# EAGLE board rele (EAGLE 5.00)
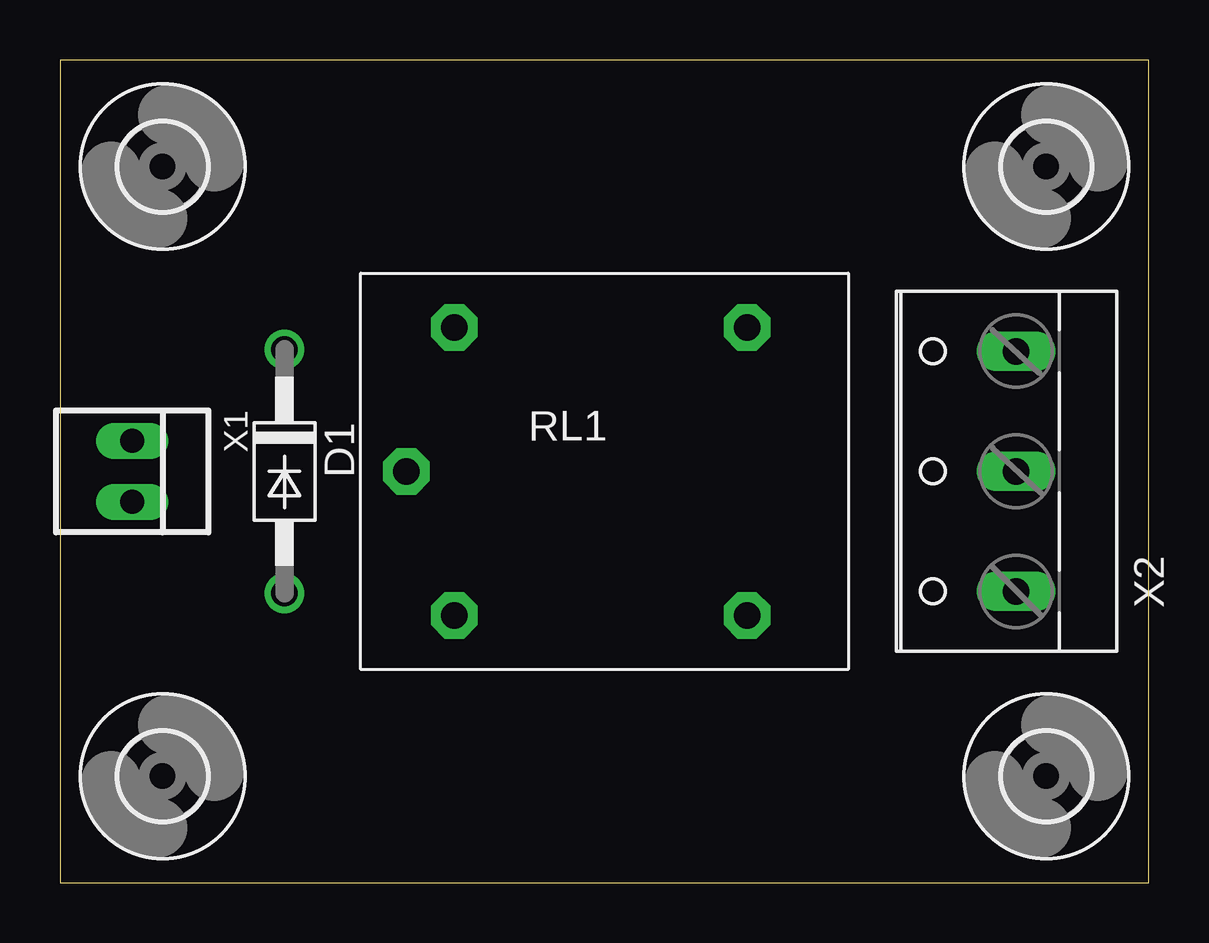
[diagram p0: board, top side]
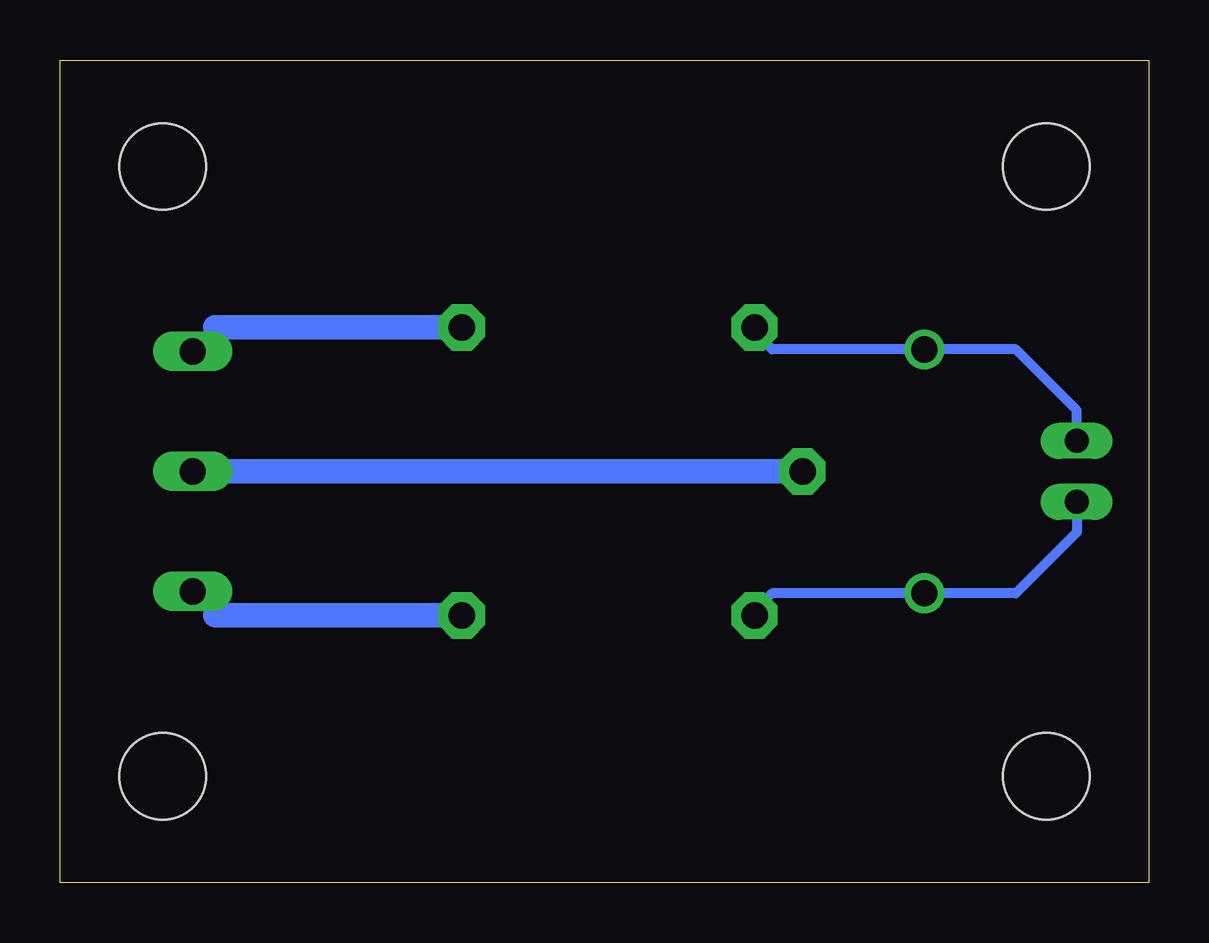
[diagram p1: board, bottom side, seen from below]

Size 45.39 x 34.28 mm. Coordinates in mm from the lower left corner, seen from the top.
Outline: 0,0 45.39,0 45.39,34.28 0,34.28 0,0
Copper layers (1*16): Top 0.035mm / dielectric 1.5mm / Bottom 0.035mm
Design rules "default": minimum track width 10mil, minimum drill 24mil, track to track 8mil, track to pad 8mil, pad to pad 8mil, via to via 8mil, smd to smd 8mil, copper to edge 40mil, drill to drill 8mil, minimum pad ring 10mil, minimum via ring 8mil, stop-mask expansion 4mil, vias tented up to drill 0mil, thermal gap 10mil

## Footprints (pad centres in the part's own frame; a part is rotated, then mirrored left to right if it is on the bottom)
DO41-10 = drill 1.1 round: A 5.08,0; C -5.08,0
AT = drill 1.1 pad 1.93 octagon: B1 -6.89,6; B2 -6.89,-6; C -8.89,0; NA 5.31,6; NF 5.31,-6
3,6 = hole 3.6: 0,0
22-23-2021 = drill 1 long: 1 -1.27,0; 2 1.27,0
W237-103 = drill 1.1 long: 1 -5,-1.29; 2 0,-1.29; 3 5,-1.29

## Placement (x,y rotation side)
D1  [DO41-10]  9.36,17.14 270 top
RL1  AT  [AT]  23.33,17.14 0 top
U$1  [3,6]  4.28,29.84 0 top
U$2  [3,6]  41.11,29.84 0 top
U$3  [3,6]  41.11,4.44 0 top
U$4  [3,6]  4.28,4.44 0 top
X1  [22-23-2021]  3.01,17.14 270 top
X2  [W237-103]  38.57,17.14 90 top

## Library data of the parts
D1 RL1 U$1-U$4 X1 X2 = Rele

## Nets
N$1: D1.C RL1.B1 X1.1
N$2: D1.A RL1.B2 X1.2
N$3: RL1.C X2.2
N$4: RL1.NF X2.1
N$5: RL1.NA X2.3

## Tracks (layer width: path | path; a pad name or v marks a point on that pad's centre or on a via)
N$1
  Bottom 0.406: X1.1 3.01,19.68 5.55,22.22 D1.C 15.71,22.22 16.44,22.95 RL1.B1
N$2
  Bottom 0.406: X1.2 3.01,14.6 5.55,12.06 D1.A 15.71,12.06 16.44,11.33 RL1.B2
N$3
  Bottom 1.016: RL1.C X2.2
N$4
  Bottom 0.406: X2.1 39.86,12.08 38.92,11.14
  Bottom 1.016: RL1.NF 38.92,11.14
N$5
  Bottom 0.406: X2.3 39.86,22.2 38.92,23.14
  Bottom 1.016: RL1.NA 38.92,23.14